# Altium PCB Detect_IR.PcbDoc
Units mm, origin at the board's own origin, x right, y up, seen from the top; angles counter-clockwise.
Board outline 18.5 x 40 mm, 2 copper layers (Top Layer, Bottom Layer), stack 1.571 mm thick; 13 components, 8 nets, 35 pads, 4 vias.
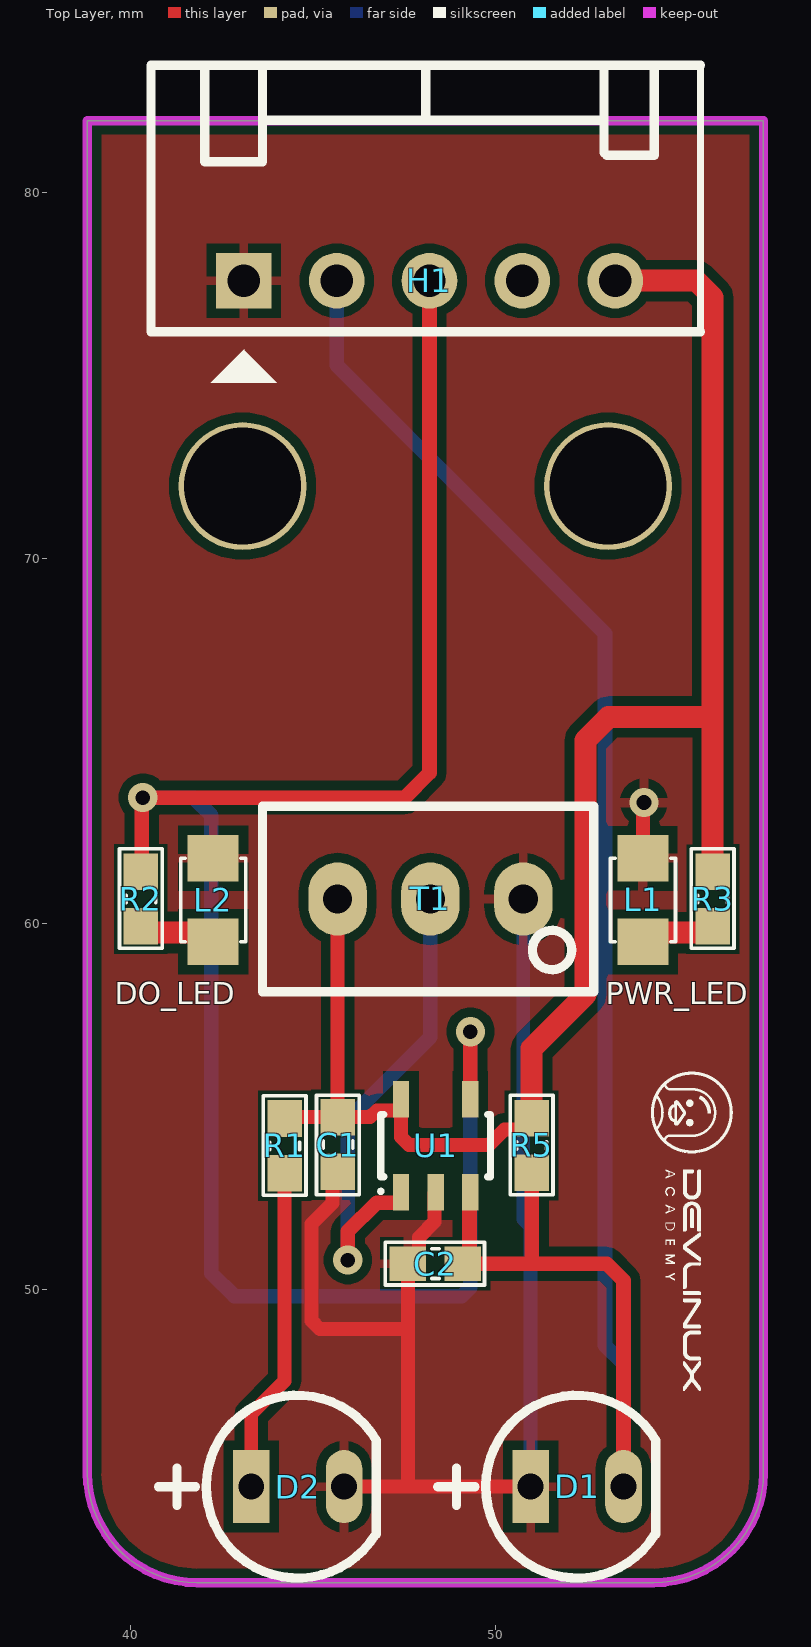
[diagram p0: Top Layer view]
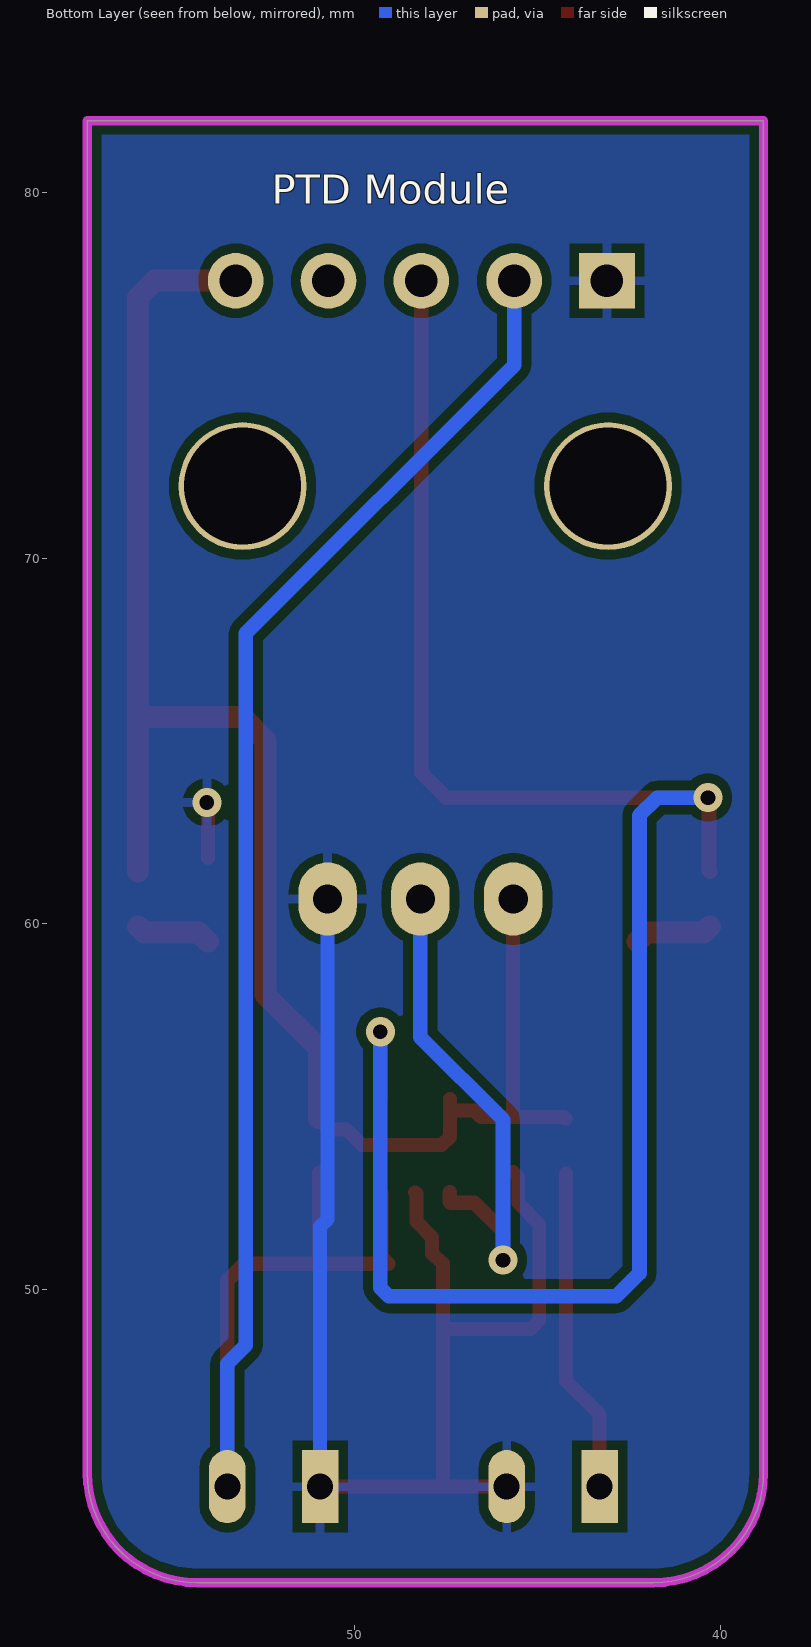
[diagram p1: Bottom Layer view, seen from below]
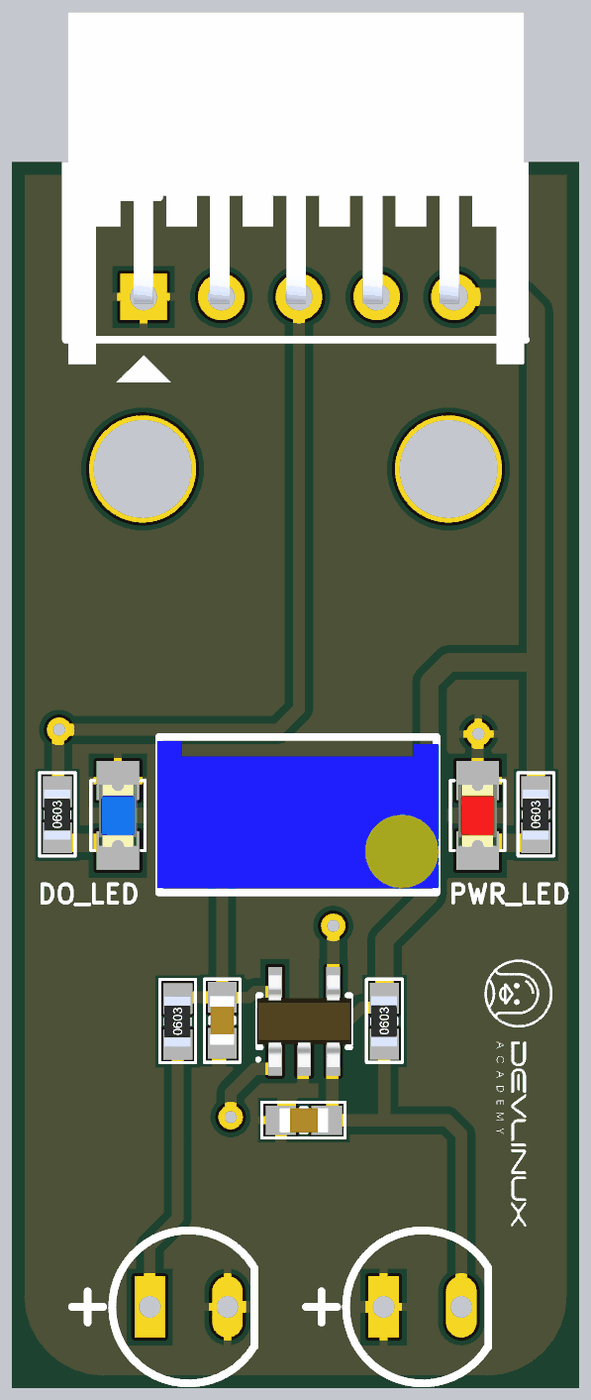
[diagram p2: 3D render of the assembled board from above, using the file's embedded part models]

## Layer stack, top to bottom
Top Solder: solder mask 0.0102, Solder Resist, Dk 3.5
Top Layer: signal copper 0.0356
Dielectric 1: dielectric 1.5, FR-4, Dk 4.8
Bottom Layer: signal copper 0.0356
Bottom Solder: solder mask 0.0102, Solder Resist, Dk 3.5

## Board outline
41.822,41.975 cw(c41.822,44.975) 38.822,44.975 38.822,81.975 57.322,81.975 57.322,44.975 cw(c54.322,44.975) 54.322,41.975

## Design rules (kind name [scope] priority, off if disabled: settings)
Clearance [All] p1: gap=0.254 ignorepadtopadclearanceinfootprint=FALSE except(0: Arc-Hole Track-Hole SMDPad-Hole THPad-Hole Via-Hole Fill-Hole Poly-Hole Region-Hole Text-Hole)
PolygonConnect [All] p1: connectstyle=Relief reliefconductorwidth=0.254 reliefentries=4 polygonreliefangle="90 Angle" airgapwidth=0.254
RoutingVias [All] p1: holewidth=0.4 width=0.8 viastyle="Through Hole" minholewidth=0.3 minwidth=0.6 maxholewidth=0.5 maxwidth=1
SolderMaskExpansion [All] p1: expansion=0.102 istentingtop=FALSE
Width [All] p1: maxlimit=0.6 minlimit=0.254 preferedwidth=0.4
30 further rules are at their usual default settings.

## Components (designator, comment, footprint, x,y, rotation, side; value= is the part's Value field where it differs from the comment)
C1 "100nF" "tu 0603" 45.674,53.962 r270 top
C2 "100nF" "tu 0603" 48.344,50.702 r180 top
D1 "PT334B" LED_CIRCLE_DIP_2P_5MM 52.222,44.602 r0 top
D2 "PT334C" LED_CIRCLE_DIP_2P_5MM 44.577,44.602 r0 top
H1 "Header 5P 2.54 Duc Cong" "Header 5P DC 2.54" 43.104,77.597 r90 top
L1 "LED RED" LED-0805-Red 54.026,59.512 r90 top
L2 "LED BLUE" LED-0805-Blue 42.266,59.512 r90 top
R1 "330" "tro smd 0603" 44.221,53.924 r90 top
R2 "1k" "tro smd 0603" 40.284,60.681 r90 top
R3 "1k" "tro smd 0603" 55.931,60.681 r90 top
R5 "10k" "tro smd 0603" 50.978,53.937 r90 top
T1 "10K" "Bien Tro Vi Chinh Dung" 48.209,60.681 r180 top
U1 "LM321" sot23-5 48.354,53.932 r90 top

## Footprints (in the part's own frame and the unit in brackets; to place one, negate y for a bottom-side part, rotate by r counter-clockwise, add the part's x,y. Pads: shape width x height; smd on the part's side, far side on the other; paste and mask are expansions set on the pad)
"Bien Tro Vi Chinh Dung" [mm] "Bien tro vi chinh"
  oval 1.6x2 hole 0.8: 1(-2.54,0) 2(0,0) 3(2.54,0)
  silkscreen extent -4.47,-2.54 4.6,2.54, body extent -4.54,-2.4 4.66,2.4, height 12.02
"Header 5P DC 2.54" [mil]
  rect 60x60 hole 35: 1(0,0)
  round 60 hole 35: 2(0,-100) 3(0,-200) 4(0,-300) 5(0,-400)
  silkscreen extent -110,-492 232,100, body extent -87,-490 366,97, height 240
LED-0805-Blue [mil]
  rect 50x55 smd: 1(0,0) 2(90,0)
  silkscreen extent 0,-35 90,35, body extent 5,-25 85,25, height 43
LED-0805-Red [mil]
  rect 50x55 smd: 1(0,0) 2(90,0)
  silkscreen extent 0,-35 90,35, body extent 5,-25 85,25, height 43
LED_CIRCLE_DIP_2P_5MM [mm]
  rect 1x2 hole 0.711: 1(-1.27,0)
  oval 1x2 hole 0.711: 2(1.27,0)
  silkscreen extent -3.81,-2.5 2.15,2.5
sot23-5 [mm]
  rect 1x0.45 smd: 1(-1.275,0.95) 2(-1.275,0) 3(-1.275,-0.95) 4(1.275,-0.95) 5(1.275,0.95)
  silkscreen extent -1.3,-1.5 0.85,1.55, body extent -1.5,-1.55 1.5,1.55, height 1.1
"tro smd 0603" [mm] "Chip Capacitor, 2-Leads, Body 1,60x0,80mm, IPC Medium Density"
  rect 1x0.95 smd mask+0.076: 1(-0.75,0) 2(0.75,0)
  silkscreen extent -1.35,-0.58 1.37,0.58, body extent -0.82,-0.42 0.82,0.43, height 0.44
"tu 0603" [mm] "Chip Capacitor, 2-Leads, Body 1,60x0,80mm, IPC Medium Density"
  rect 1x0.95 smd mask+0.076: 1(-0.75,0) 2(0.75,0)
  silkscreen extent -1.35,-0.58 1.37,0.58, body extent -0.8,-0.4 0.8,0.4, height 0.9

## Part data
C1 C2: library part "Tu 0603 104 50V 10%", "Dán", Chung_Loai=Dán, Don_Vi=Con, Ma_Hang=MH004568, So_Chan=2, Ten_Linh_Kien="Tụ 0603 104-100nF 10% 50V"
D1 D2: library part LED_DIP_2P, "Led"
H1: "Cắm", Chung_Loai=Cắm, Don_Vi=Con, Ma_Hang=MH001308, Ten_Linh_Kien="Header 5P XH2.54-5P Đực Cong"
L1: library part "LED 0805 Do", "Dán", Chung_Loai=Dán, Don_Vi=Con, Ma_Hang=MH000897, Ten_Linh_Kien="LED 0805 Màu Đỏ (Red)"
L2: library part "LED 0805 Xanh Duong", "Dán", Chung_Loai=Dán, Don_Vi=Con, Ma_Hang=MH002327, Ten_Linh_Kien="LED 0805 Màu Xanh Dương (Blue)"
R1 R5: library part "Tro 0603 1% 10k", "Dán", Chung_Loai=Dán, Don_Vi=Con, Ma_Hang=MH006333, So_Chan=2, Ten_Linh_Kien="Trở 0603 1% 10k"
R2 R3: library part "Tro 0603 1% 1k", "Dán", Chung_Loai=Dán, Don_Vi=Con, Ma_Hang=MH006334, So_Chan=2, Ten_Linh_Kien="Trở 0603 1% 1k"
T1: library part "Bien Tro Tinh Chinh 10K Dung", "Cắm", Chung_Loai=Cắm, Don_Vi=Con, Ma_Hang=MH003232, Ten_Linh_Kien="Biến Trở VR 103-10K 3296W"
U1: "Opamp"

## Free pads (board coordinates)
  round 3.5 hole 3.2: 3(43.072,71.975) 3(53.072,71.975)

## Via types
v1: diameter 0.8, hole 0.4, Top Layer to Bottom Layer, 4 vias

## Nets (pads, with @x,y where several pads share a name; then routed paths per layer and width w, separated by ;. In a path a pad name is that pad's centre, name@x,y a point inside that pad or via, vN(x,y) a via of type N, cw(c..) or ccw(c..) an arc to the next point about the centre after c; other vN are vias at no path point)
+5: C1.1 H1.5 R1.2 R3.2 R5.2 T1.3 U1.5 | length 47.5
  Top Layer w0.381: R1.2 44.262,54.715 C1.1@45.672,54.715 ; T1.3@45.314,60.579 T1.3@45.318,60.574 ; T1.3 45.672,60.678 C1.1@45.672,54.715 ; U1.5 U1.5@47.404,54.932 ; R5.2 50.978,54.662 50.693,54.377 50.237,54.377 49.809,53.95 47.627,53.95 47.404,54.173 U1.5@47.404,54.932 ; C1.1@45.672,54.715 C1.1 46.559,54.712 46.744,54.898 47.369,54.898 U1.5@47.404,54.932
  Top Layer w0.6: R5.2 50.978,56.591 52.451,58.064 52.451,65.024 53.086,65.659 55.931,65.659 ; H1.5 55.478,77.597 55.931,77.144 55.931,65.659 ; R3.2 55.931,65.659
A_OUT: C2.1 D1.2 H1.2 R5.1 U1.3 | length 51
  Top Layer w0.4: U1.3 49.279,52.632 49.279,50.887 C2.1 51.063,50.702 ; R5.1 50.978,50.787 51.063,50.702 ; D1.2 53.492,50.241 53.031,50.702 51.063,50.702
  Bottom Layer w0.4: H1.2 45.644,75.286 52.984,67.945 52.984,48.475 53.492,47.967 D1.2
D_OUT: H1.3 R2.2 U1.4 | length 54.5
  Top Layer w0.4: R2.2 40.313,61.459 40.313,63.427 v1(40.342,63.456) 47.504,63.456 48.184,64.135 H1.3 ; U1.4 v1(49.304,57.051)
  Bottom Layer w0.4: v1(40.342,63.456) 41.726,63.456 42.215,62.967 42.215,50.444 42.85,49.809 49.07,49.809 49.304,50.044 v1(49.304,57.051)
GND: C1.2 C2.2 D1.1 D2.2 H1.1 L1.2 L2.2 T1.1 U1.2 | length 38.6
  Top Layer w0.381: C1.2 45.531,53.069 45.531,52.364 44.958,51.791 44.958,49.144 45.181,48.92 47.594,48.92 ; D2.2 47.6,44.602 ; U1.2 48.319,52.623 48.319,51.85 47.893,51.424 47.893,50.987 47.609,50.702 C2.2 47.594,48.92 ; D1.1 47.6,44.602 ; L1.2 54.026,63.297 v1(54.051,63.322) ; 47.594,48.92 47.594,44.608 47.6,44.602
  Bottom Layer w0.381: D1.1 50.952,51.714 50.749,51.918 T1.1 T1.1@50.952,60.477
NetD2_1: D2.1 R1.1 | length 9
  Top Layer w0.381: D2.1 43.307,46.584 44.221,47.498 R1.1
NetL1_1: L1.1 R3.1 | length 2.1
  Top Layer w0.6: L1.1 54.28,59.766 55.766,59.766 R3.1
NetL2_1: L2.1 R2.1 | length 2.2
  Top Layer w0.6: R2.1 40.449,59.766 42.012,59.766 L2.1
NetT1_2: T1.2 U1.1 | length 13.7
  Top Layer w0.4: v1(45.949,50.8) 45.949,51.587 46.736,52.375 47.379,52.375 47.404,52.4 U1.1
  Bottom Layer w0.4: v1(45.949,50.8) 45.949,54.635 48.209,56.896 T1.2
pads on no net: H1.4

## Polygon pours and split planes (outlines as drawn)
GND on Top Layer "GND_L01_P002" (solid, remove dead copper, pour order 2): 35.382,84.074 59.385,84.074 59.385,40.284 59.207,40.107 58.318,40.996 36.779,40.996
GND on Bottom Layer "GND_L02_P003" (solid, remove dead copper, pour order 3): 36.576,83.998 59.842,83.998 60.808,83.033 59.284,81.509 59.284,38.811 39.065,38.811 36.982,40.894

## Keep-outs
Keep-Out Layer:
  the board outline again, w0.254

## Silkscreen, mask and mechanical layers (free items; w line width, h text height)
Top Overlay:
  drawing of 21 lines, arcs and shapes, not listed
  text "DO_LED" at 39.566,57.802 h0.6
  text "PWR_LED" at 53.003,57.802 h0.6
Bottom Overlay:
  text "PTD Module" at 52.276,79.703 h0.8